# Altium PCB HTSSOP-28_L9.8-W4.5-P0.65-LS6.6-BL-EP.pcbdoc
Units mm, origin at the board's own origin, x right, y up, seen from the top; angles counter-clockwise.
Board outline 22.62 x 20.18 mm, 2 copper layers (Top Layer, Bottom Layer); 1 components, 0 nets, 29 pads, 0 vias.
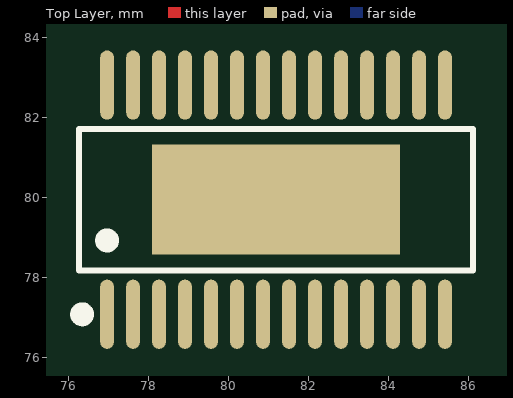
[diagram p0: Top Layer view]
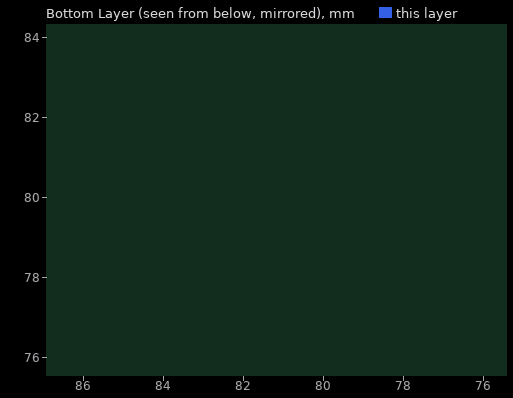
[diagram p1: Bottom Layer view, seen from below]

## Layer stack, top to bottom
Top Solder: solder mask 0.0102, Solder Resist, Dk 3.5
Top Layer: signal copper 0.0356
Dielectric 1: dielectric 0.32, FR-4, Dk 4.8
Bottom Layer: signal copper 0.0356
Bottom Solder: solder mask 0.0102, Solder Resist, Dk 3.5

## Board outline
92.474,69.85 69.85,69.85 69.85,90.03 92.474,90.03

## Components (designator, comment, footprint, x,y, rotation, side; value= is the part's Value field where it differs from the comment)
? "HTSSOP-28_L9.8-W4.5-P0.65-LS6.6-BL-EP" HTSSOP-28_L9.8-W4.5-P0.65-LS6.6-BL-EP 81.199,79.949 r0 top

## Footprints (in the part's own frame and the unit in brackets; to place one, negate y for a bottom-side part, rotate by r counter-clockwise, add the part's x,y. Pads: shape width x height; smd on the part's side, far side on the other; paste and mask are expansions set on the pad)
HTSSOP-28_L9.8-W4.5-P0.65-LS6.6-BL-EP [mil]
  oval 13.5x68.2 smd: 1(-166.3,-112.8) 2(-140.7,-112.8) 3(-115.2,-112.8) 4(-89.6,-112.8) 5(-64,-112.8) 6(-38.4,-112.8) 7(-12.8,-112.8) 8(12.8,-112.8) 9(38.4,-112.8) 10(64,-112.8) 11(89.6,-112.8) 12(115.2,-112.8) 13(140.8,-112.8) 14(166.3,-112.8) 15(166.3,112.8) 16(140.8,112.8) 17(115.2,112.8) 18(89.6,112.8) 19(64,112.8) 20(38.4,112.8) 21(12.8,112.8) 22(-12.8,112.8) 23(-38.4,112.8) 24(-64,112.8) 25(-89.6,112.8) 26(-115.2,112.8) 27(-140.7,112.8) 28(-166.3,112.8)
  rect 244.1x108.3 smd: 29(0,0)
  silkscreen extent -197,-119 194,70

## Nets (pads, with @x,y where several pads share a name; then routed paths per layer and width w, separated by ;. In a path a pad name is that pad's centre, name@x,y a point inside that pad or via, vN(x,y) a via of type N, cw(c..) or ccw(c..) an arc to the next point about the centre after c; other vN are vias at no path point)
pads on no net: ?.1 ?.2 ?.3 ?.4 ?.5 ?.6 ?.7 ?.8 ?.9 ?.10 ?.11 ?.12 ?.13 ?.14 ?.15 ?.16 ?.17 ?.18 ?.19 ?.20 ?.21 ?.22 ?.23 ?.24 ?.25 ?.26 ?.27 ?.28 ?.29